# EAGLE board Test (EAGLE 6.4)
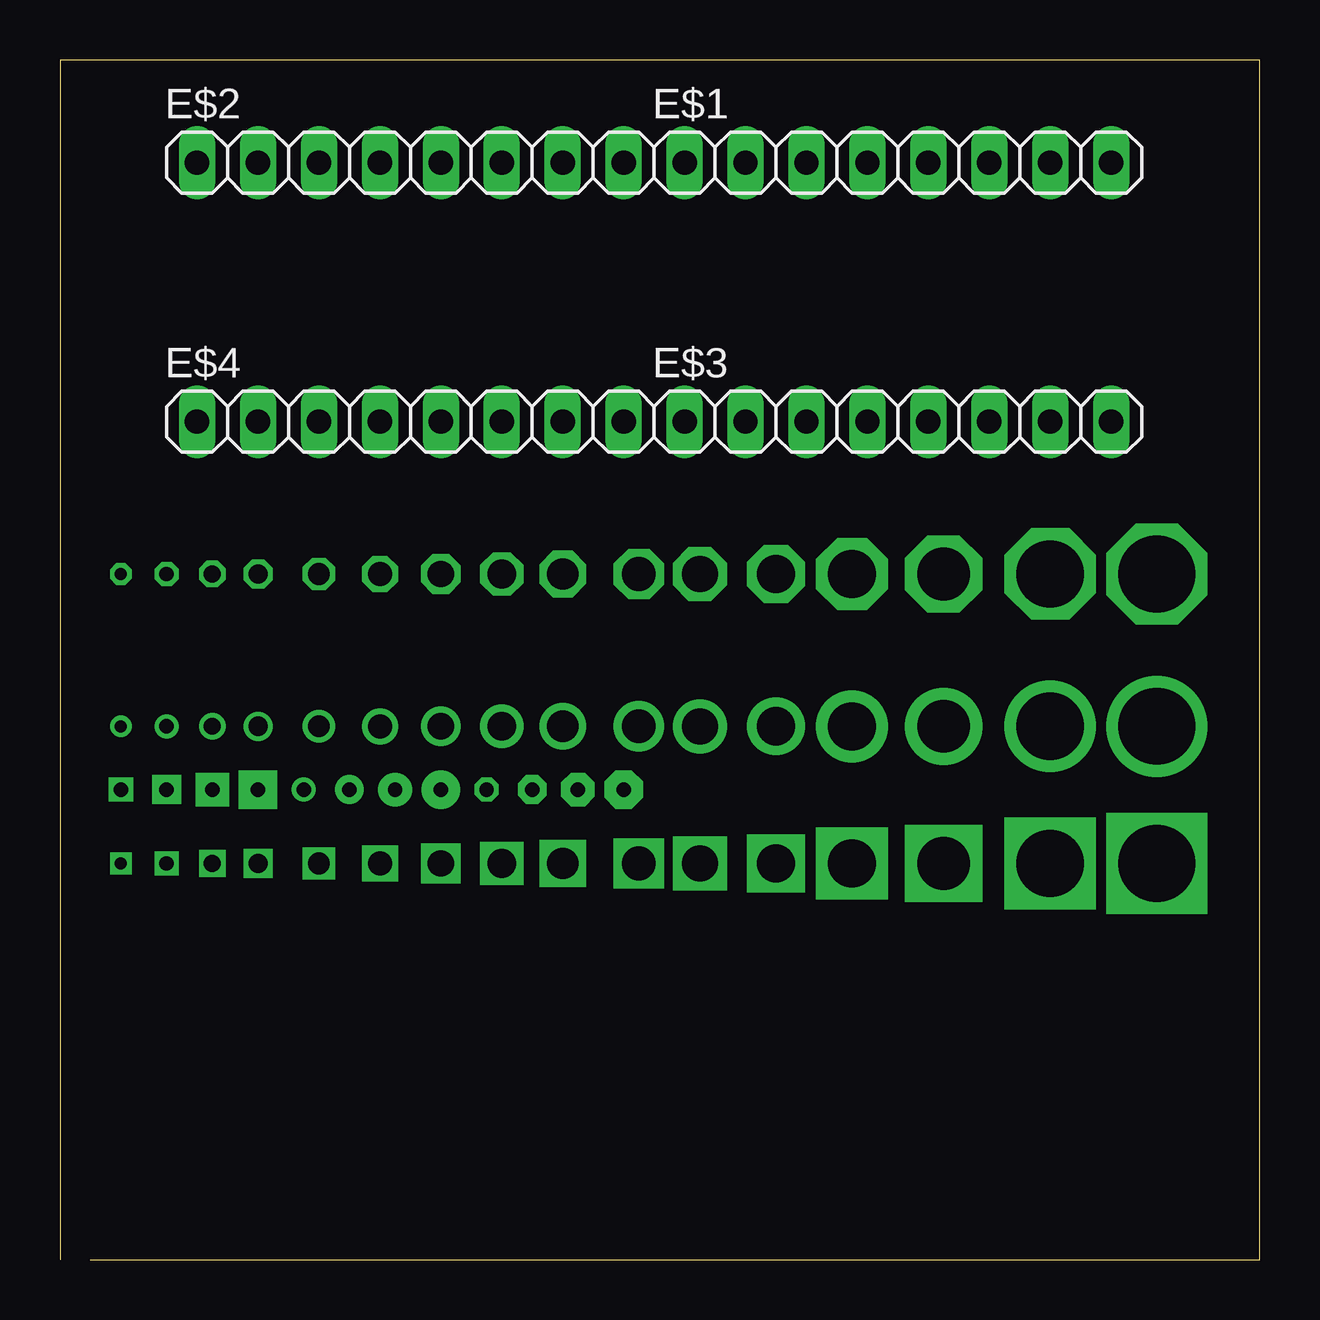
[diagram p0: board, top side]
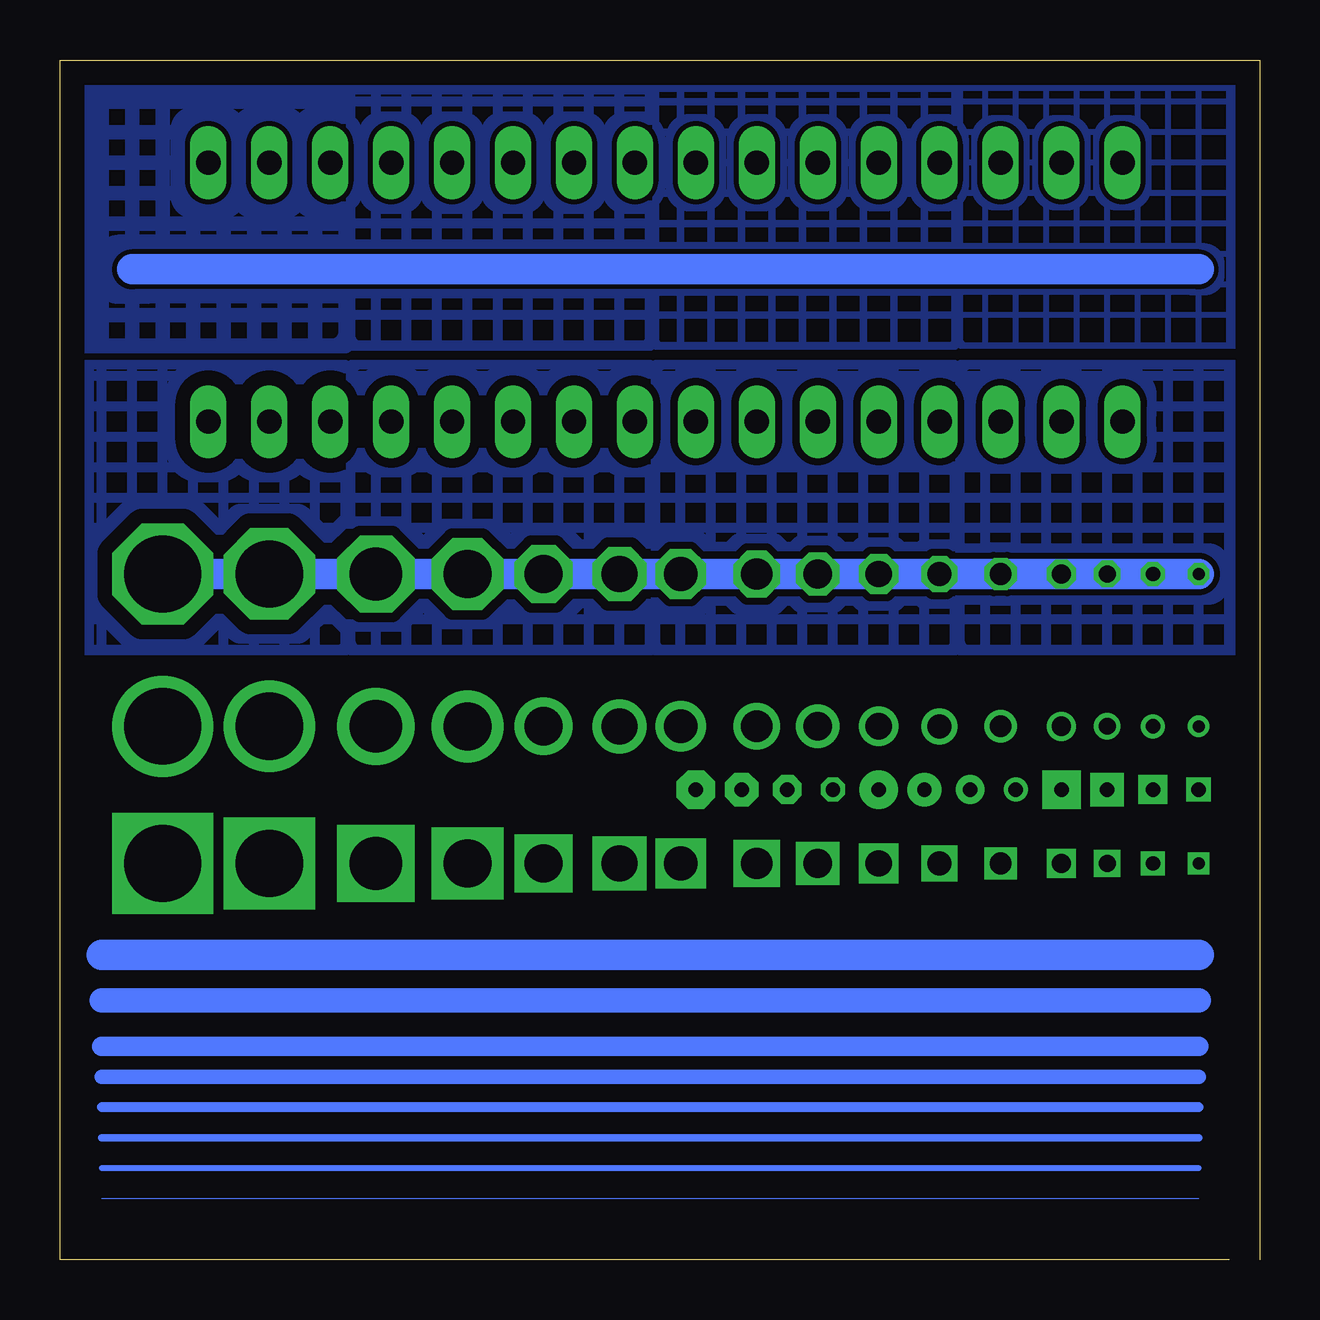
[diagram p1: board, bottom side, seen from below]

Size 50 x 50 mm. Coordinates in mm from the lower left corner, seen from the top.
Outline: 1.27,0 50,0 50,50 0,50 0,0
Copper layers (1*16): Top 0.035mm / dielectric 1.5mm / Bottom 0.035mm
Design rules "default": minimum track width 10mil, minimum drill 24mil, track to track 8mil, track to pad 8mil, pad to pad 8mil, via to via 8mil, smd to smd 8mil, copper to edge 40mil, drill to drill 8mil, minimum pad ring 10mil, minimum via ring 8mil, stop-mask expansion 4mil, vias tented up to drill 0mil, thermal gap 10mil

## Footprints (pad centres in the part's own frame; a part is rotated, then mirrored left to right if it is on the bottom)
1X08 = drill 1.016 long: 1 -8.89,0; 2 -6.35,0; 3 -3.81,0; 4 -1.27,0; 5 1.27,0; 6 3.81,0; 7 6.35,0; 8 8.89,0

## Placement (x,y rotation side)
E$1  [1X08]  34.92,45.72 0 top
E$2  [1X08]  14.61,45.72 0 top
E$3  [1X08]  34.92,34.92 0 top
E$4  [1X08]  14.61,34.92 0 top

## Library data of the parts
E$1-E$4 = pinhead

## Tracks (layer width: path | path; a pad name or v marks a point on that pad's centre or on a via)
S$1
  Bottom 0: 2.54,2.54 48.26,2.54
S$2
  Bottom 0.254: 2.54,3.81 48.26,3.81
S$3
  Bottom 0.305: 2.54,5.08 48.26,5.08
S$4
  Bottom 0.406: 2.54,6.35 48.26,6.35
S$5
  Bottom 0.61: 2.54,7.62 48.26,7.62
S$6
  Bottom 0.813: 2.54,8.89 48.26,8.89
S$7
  Bottom 1.016: 2.54,10.79 48.26,10.79
S$8
  Bottom 1.27: 2.54,12.7 48.26,12.7
S$9  (via drill 0.5)
  other vias: 2.54,16.51
S$10  (via drill 3.2)
  other vias: 45.72,16.51
S$11  (via drill 2.8)
  other vias: 41.27,16.51
S$12  (via drill 2.2)
  other vias: 36.83,16.51
S$13  (via drill 2)
  other vias: 33.02,16.51
S$14  (via drill 1.6)
  other vias: 29.84,16.51
S$15  (via drill 1.5)
  other vias: 26.67,16.51
S$16  (via drill 1.4)
  other vias: 24.13,16.51
S$17  (via drill 1.3)
  other vias: 20.95,16.51
S$18  (via drill 1.2)
  other vias: 18.41,16.51
S$19  (via drill 1.1)
  other vias: 15.88,16.51
S$20  (via drill 1)
  other vias: 13.34,16.51
S$21  (via drill 0.9)
  other vias: 10.79,16.51
S$22  (via drill 0.8)
  other vias: 8.26,16.51
S$23  (via drill 0.7)
  other vias: 6.35,16.51
S$24  (via drill 0.6)
  other vias: 4.45,16.51
S$25  (via drill 0.5)
  other vias: 2.54,22.23
S$26  (via drill 3.2)
  other vias: 45.72,22.23
S$27  (via drill 2.8)
  other vias: 41.27,22.23
S$28  (via drill 2.2)
  other vias: 36.83,22.23
S$29  (via drill 2)
  other vias: 33.02,22.23
S$30  (via drill 1.6)
  other vias: 29.84,22.23
S$31  (via drill 1.5)
  other vias: 26.67,22.23
S$32  (via drill 1.4)
  other vias: 24.13,22.23
S$33  (via drill 1.3)
  other vias: 20.95,22.23
S$34  (via drill 1.2)
  other vias: 18.41,22.23
S$35  (via drill 1.1)
  other vias: 15.88,22.23
S$36  (via drill 1)
  other vias: 13.34,22.23
S$37  (via drill 0.9)
  other vias: 10.79,22.23
S$38  (via drill 0.8)
  other vias: 8.26,22.23
S$39  (via drill 0.7)
  other vias: 6.35,22.23
S$40  (via drill 0.6)
  other vias: 4.45,22.23
S$41  (via drill 0.5)
  other vias: 2.54,28.57
S$42  (via drill 3.2)
  other vias: 45.72,28.57
S$43  (via drill 2.8)
  other vias: 41.27,28.57
S$44  (via drill 2.2)
  other vias: 36.83,28.57
S$45  (via drill 2)
  other vias: 33.02,28.57
S$46  (via drill 1.6)
  other vias: 29.84,28.57
S$47  (via drill 1.5)
  other vias: 26.67,28.57
S$48  (via drill 1.4)
  other vias: 24.13,28.57
S$49  (via drill 1.3)
  other vias: 20.95,28.57
S$50  (via drill 1.2)
  other vias: 18.41,28.57
S$51  (via drill 1.1)
  other vias: 15.88,28.57
S$52  (via drill 1)
  other vias: 13.34,28.57
S$53  (via drill 0.9)
  other vias: 10.79,28.57
S$54  (via drill 0.8)
  other vias: 8.26,28.57
S$55  (via drill 0.7)
  other vias: 6.35,28.57
S$56  (via drill 0.6)
  other vias: 4.45,28.57
S$57  (via drill 0.6 pad 1)
  other vias: 2.54,19.59
S$58  (via drill 0.6 pad 1.2)
  other vias: 4.45,19.59
S$59  (via drill 0.6 pad 1.4, 0.6 pad 1.6)
  other vias: 6.35,19.59 8.26,19.59
S$60  (via drill 0.6 pad 1)
  other vias: 10.16,19.59
S$61  (via drill 0.6 pad 1.2)
  other vias: 12.06,19.59
S$62  (via drill 0.6 pad 1.4, 0.6 pad 1.6)
  other vias: 13.97,19.59 15.88,19.59
S$63  (via drill 0.6 pad 1)
  other vias: 17.78,19.59
S$64  (via drill 0.6 pad 1.2)
  other vias: 19.68,19.59
S$65  (via drill 0.6 pad 1.4, 0.6 pad 1.6)
  other vias: 21.59,19.59 23.5,19.59
S$66
  pour Bottom (hatched): 0,38.08 12.46,38.08 12.46,50 0,50
  pour Bottom (hatched): 12.7,38.08 25.16,38.08 25.16,50 12.7,50
  pour Bottom (hatched): 25.4,38.08 37.86,38.08 37.86,50 25.4,50
  pour Bottom (hatched): 38.1,38.08 50.56,38.08 50.56,50 38.1,50
S$67
  Bottom 1.27: 2.54,41.27 46.99,41.27
S$68
  pour Bottom (isolate 0.254, hatched): 0,25.38 12.46,25.38 12.46,37.3 0,37.3
  pour Bottom (isolate 0.305, hatched): 12.7,25.38 25.16,25.38 25.16,37.3 12.7,37.3
  pour Bottom (isolate 0.406, hatched): 25.4,25.38 37.86,25.38 37.86,37.3 25.4,37.3
  pour Bottom (isolate 0.61, hatched): 38.1,25.38 50.56,25.38 50.56,37.3 38.1,37.3
S$69
  Bottom 1.27: 2.54,28.57 46.99,28.57